# EAGLE board pic32mk (EAGLE 9.6.1)
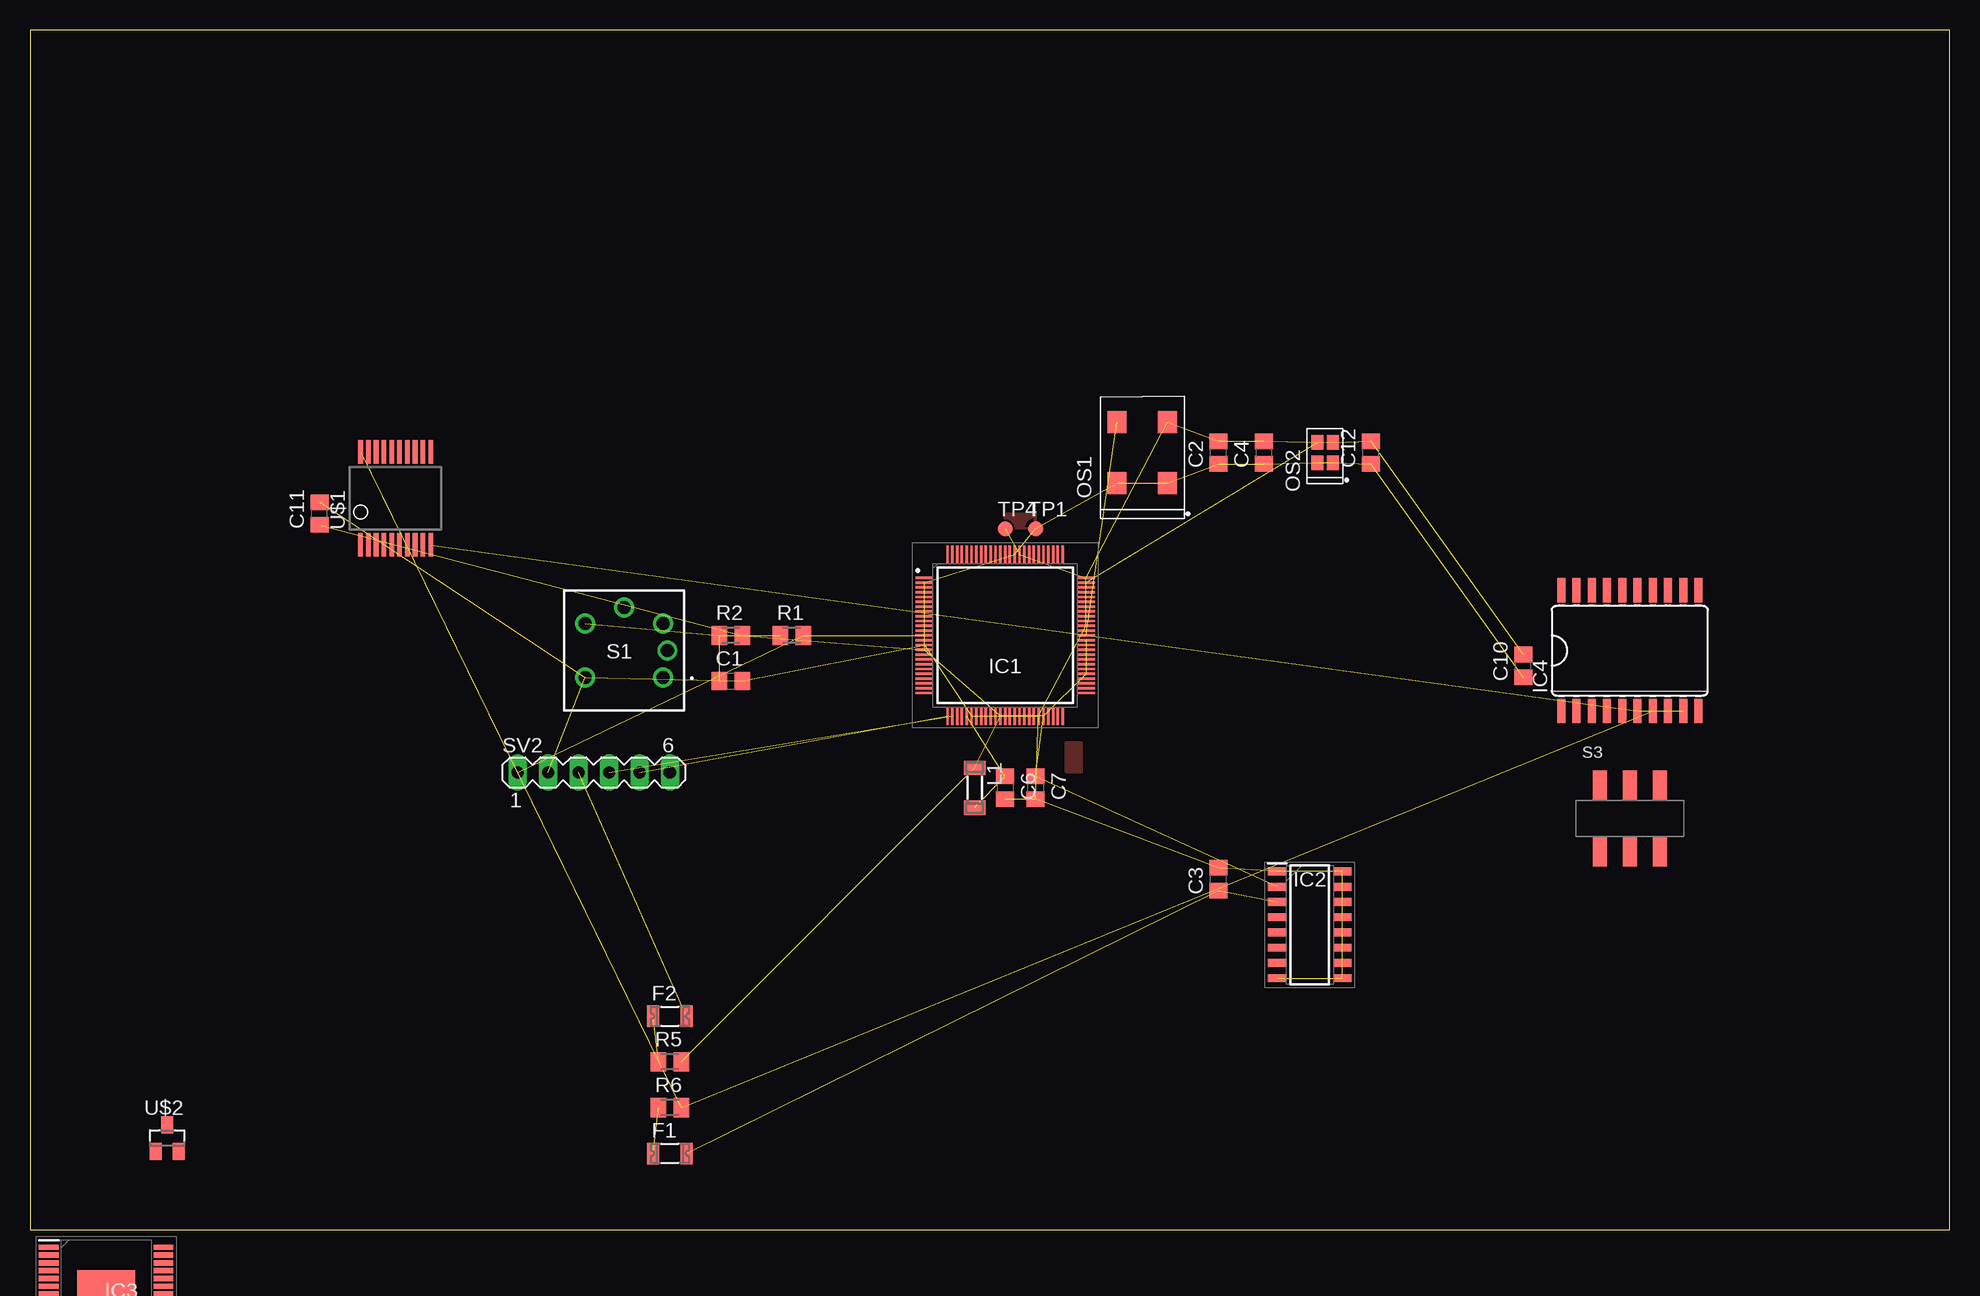
[diagram p0: board, top side]

Size 160 x 100 mm. Coordinates in mm from the lower left corner, seen from the top.
Outline: 0,0 160,0 160,100 0,100 0,0
Copper layers (1*16): Top 0.035mm / dielectric 1.5mm / Bottom 0.035mm
Design rules "default *": minimum track width 6mil, minimum drill 0.35mm, track to track 6mil, track to pad 6mil, pad to pad 6mil, via to via 6mil, smd to smd 6mil, copper to edge 40mil, drill to drill 6mil, minimum pad ring 10mil, minimum via ring 8mil, stop-mask expansion 4mil, vias tented up to drill 0mil, thermal gap 10mil
Net classes: 1 icurrent: width 0.216 mm

## Footprints (pad centres in the part's own frame; a part is rotated, then mirrored left to right if it is on the bottom)
C0805 = smd 1.3 x 1.5: 1 -0.95,0; 2 0.95,0
1206L = smd 1 x 1.8: 1 -1.4,0; 2 1.4,0
QFP40P1400X1400X120-100N = smd 1.475 x 0.2: 1 -6.738,4.8; 2 -6.738,4.4; 3 -6.738,4; 4 -6.738,3.6; 5 -6.738,3.2; 6 -6.738,2.8; 7 -6.738,2.4; 8 -6.738,2; 9 -6.738,1.6; 10 -6.738,1.2; 11 -6.738,0.8; 12 -6.738,0.4; 13 -6.738,0; 14 -6.738,-0.4; 15 -6.738,-0.8; 16 -6.738,-1.2; 17 -6.738,-1.6; 18 -6.738,-2; 19 -6.738,-2.4; 20 -6.738,-2.8; 21 -6.738,-3.2; 22 -6.738,-3.6; 23 -6.738,-4; 24 -6.738,-4.4; 25 -6.738,-4.8; 51 6.738,-4.8; 52 6.738,-4.4; 53 6.738,-4; 54 6.738,-3.6; 55 6.738,-3.2; 56 6.738,-2.8; 57 6.738,-2.4; 58 6.738,-2; 59 6.738,-1.6; 60 6.738,-1.2; 61 6.738,-0.8; 62 6.738,-0.4; 63 6.738,0; 64 6.738,0.4; 65 6.738,0.8; 66 6.738,1.2; 67 6.738,1.6; 68 6.738,2; 69 6.738,2.4; 70 6.738,2.8; 71 6.738,3.2; 72 6.738,3.6; 73 6.738,4; 74 6.738,4.4; 75 6.738,4.8 | smd 0.2 x 1.475: 26 -4.8,-6.738; 27 -4.4,-6.738; 28 -4,-6.738; 29 -3.6,-6.738; 30 -3.2,-6.738; 31 -2.8,-6.738; 32 -2.4,-6.738; 33 -2,-6.738; 34 -1.6,-6.738; 35 -1.2,-6.738; 36 -0.8,-6.738; 37 -0.4,-6.738; 38 0,-6.738; 39 0.4,-6.738; 40 0.8,-6.738; 41 1.2,-6.738; 42 1.6,-6.738; 43 2,-6.738; 44 2.4,-6.738; 45 2.8,-6.738; 46 3.2,-6.738; 47 3.6,-6.738; 48 4,-6.738; 49 4.4,-6.738; 50 4.8,-6.738; 76 4.8,6.738; 77 4.4,6.738; 78 4,6.738; 79 3.6,6.738; 80 3.2,6.738; 81 2.8,6.738; 82 2.4,6.738; 83 2,6.738; 84 1.6,6.738; 85 1.2,6.738; 86 0.8,6.738; 87 0.4,6.738; 88 0,6.738; 89 -0.4,6.738; 90 -0.8,6.738; 91 -1.2,6.738; 92 -1.6,6.738; 93 -2,6.738; 94 -2.4,6.738; 95 -2.8,6.738; 96 -3.2,6.738; 97 -3.6,6.738; 98 -4,6.738; 99 -4.4,6.738; 100 -4.8,6.738
SOIC127P600X175-16N = smd 1.525 x 0.65: 1 -2.712,4.445; 2 -2.712,3.175; 3 -2.712,1.905; 4 -2.712,0.635; 5 -2.712,-0.635; 6 -2.712,-1.905; 7 -2.712,-3.175; 8 -2.712,-4.445; 9 2.712,-4.445; 10 2.712,-3.175; 11 2.712,-1.905; 12 2.712,-0.635; 13 2.712,0.635; 14 2.712,1.905; 15 2.712,3.175; 16 2.712,4.445
SOP65P1030X245-33N = smd 1.65 x 0.45: 1 -4.775,4.875; 2 -4.775,4.225; 3 -4.775,3.575; 4 -4.775,2.925; 5 -4.775,2.275; 6 -4.775,1.625; 7 -4.775,0.975; 8 -4.775,0.325; 9 -4.775,-0.325; 10 -4.775,-0.975; 11 -4.775,-1.625; 12 -4.775,-2.275; 13 -4.775,-2.925; 14 -4.775,-3.575; 15 -4.775,-4.225; 16 -4.775,-4.875; 17 4.775,-4.875; 18 4.775,-4.225; 19 4.775,-3.575; 20 4.775,-2.925; 21 4.775,-2.275; 22 4.775,-1.625; 23 4.775,-0.975; 24 4.775,-0.325; 25 4.775,0.325; 26 4.775,0.975; 27 4.775,1.625; 28 4.775,2.275; 29 4.775,2.925; 30 4.775,3.575; 31 4.775,4.225; 32 4.775,4.875 | smd 4.8 x 5.9: 33 0,0
SO20L = smd 0.66 x 2.032: 1 -5.715,-5.029; 2 -4.445,-5.029; 3 -3.175,-5.029; 4 -1.905,-5.029; 5 -0.635,-5.029; 6 0.635,-5.029; 7 1.905,-5.029; 8 3.175,-5.029; 9 4.445,-5.029; 10 5.715,-5.029; 11 5.715,5.029; 12 4.445,5.029; 13 3.175,5.029; 14 1.905,5.029; 15 0.635,5.029; 16 -0.635,5.029; 17 -1.905,5.029; 18 -3.175,5.029; 19 -4.445,5.029; 20 -5.715,5.029
SM-1206 = smd 1.2 x 1.8: 1 -1.65,0; 2 1.65,0
7.2X5.2-4-PAD = smd 1.8 x 1.6: 1 -2.54,-2.1; 2 2.54,-2.1; 3 2.54,2.1; 4 -2.54,2.1
2.5X2-4-PAD = smd 1.2 x 1: 1 -0.85,-0.65; 2 0.85,-0.65; 3 0.85,0.65; 4 -0.85,0.65
M0805 = smd 1.3 x 1.6: 1 -0.95,0; 2 0.95,0
B3W-9_1-LED = drill 1.1 pad 1.65: 1 3.25,-2.25; 2 -3.25,-2.25; 3 3.25,2.25; 4 -3.25,2.25; 5 0,3.6; 6 3.6,0
SW_JS202011SCQN = smd 1.2 x 2.5: 1 -2.5,-2.75; 2 0,-2.75; 3 2.5,-2.75; 4 -2.5,2.75; 5 0,2.75; 6 2.5,2.75
MA06-1 = drill 1.016 long: 1 -6.35,0; 2 -3.81,0; 3 -1.27,0; 4 1.27,0; 5 3.81,0; 6 6.35,0
B1,27 = smd 1.27 x 1.27: TP 0,0
SSOP20 = smd 0.381 x 1.93: CH_L 2.925,3.879; EN_L -2.925,-3.879; GND 2.925,-3.879; IN1 -2.275,-3.879; IN2 -1.625,-3.879; IN3 -0.975,-3.879; IN4 -0.325,-3.879; IN5 0.325,-3.879; IN6 0.975,-3.879; IN7 1.625,-3.879; IN8 2.275,-3.879; OUT1 -2.275,3.879; OUT2 -1.625,3.879; OUT3 -0.975,3.879; OUT4 -0.325,3.879; OUT5 0.325,3.879; OUT6 0.975,3.879; OUT7 1.625,3.879; OUT8 2.275,3.879; VCC -2.917,3.868
SOT23 = smd 1 x 1.4: 1 -0.95,-1.1; 2 0.95,-1.1; 3 0,1.1

## Placement (x,y rotation side)
C1  0.1  [C0805]  58.42,45.72 0 top
C2  0.1  [C0805]  99.06,64.77 90 top
C3  0.1  [C0805]  99.06,29.21 90 top
C4  0.1  [C0805]  102.87,64.77 90 top
C6  0.1  [C0805]  81.28,36.83 270 top
C7  0.1  [C0805]  83.82,36.83 270 top
C10  0.1  [C0805]  124.46,46.99 90 top
C11  0.1  [C0805]  24.13,59.69 90 top
C12  0.1  [C0805]  111.76,64.77 90 top
F1  1206L050  [1206L]  53.34,6.35 0 top
F2  1206L050  [1206L]  53.34,17.78 0 top
IC1  PIC32MK1024MCF100-I_PT  [QFP40P1400X1400X120-100N]  81.28,49.53 0 top
IC2  ADM3095EBRZ  [SOIC127P600X175-16N]  106.68,25.4 0 top
IC3  MC33931EK  [SOP65P1030X245-33N]  6.35,-6.35 0 top
IC4  MAX203ECWP  [SO20L]  133.35,48.26 0 top
IC5  MC33931EK  [SOP65P1030X245-33N]  6.35,-19.05 0 top  (outside the outline)
L1  1000  [SM-1206]  78.74,36.83 270 top
OS1  OSC-OE-CFPS-32  [7.2X5.2-4-PAD]  92.71,64.77 90 top
OS2  OSC-OE-IQXO-793  [2.5X2-4-PAD]  107.95,64.77 90 top
R1  1k  [M0805]  63.5,49.53 0 top
R2  10k  [M0805]  58.42,49.53 0 top
R5  0  [M0805]  53.34,13.97 0 top
R6  0  [M0805]  53.34,10.16 0 top
S1  B3W-9000-Y1N  [B3W-9_1-LED]  49.53,48.26 0 top
S3  JS202011SCQN  [SW_JS202011SCQN]  133.35,34.29 0 top
SV2  ICSP2  [MA06-1]  46.99,38.1 0 top
TP1  TPB1,27  [B1,27]  83.82,58.42 0 top
TP4  TPB1,27  [B1,27]  81.28,58.42 0 top
U$1  MAX6818  [SSOP20]  30.48,60.96 0 top
U$2  IRLML2502TRPBF  [SOT23]  11.43,7.62 0 top

## Library data of the parts
C1-C4 C6 C7 C10-C12 = rcl; SPICEPREFIX: C
F1 F2 = polyfuse-smd_10; MF: Littelfuse; MPN: 1206L050; OC_FARNELL: 1596993; OC_NEWARK: 53M6118
IC1 = PIC32MK1024MCF100-I_PT; DESCRIPTION: Microchip Technology MCU32, 120MHz, 4 I2C, 6 I2S, USB FS, CAN 2.0B, 12-bit ADC, Motor Control; HEIGHT: 1.2mm; MANUFACTURER_NAME: Microchip; MANUFACTURER_PART_NUMBER: PIC32MK1024MCF100-I/PT; MOUSER_PART_NUMBER: 579-2MK1024MCF100IPT; MOUSER_PRICE-STOCK: https://www.mouser.com/Search/Refine.aspx?Keyword=579-2MK1024MCF100IPT; RS_PART_NUMBER: 1449608P; RS_PRICE-STOCK: http://uk.rs-online.com/web/p/products/1449608P
IC2 = SamacSys_Parts; DESCRIPTION: Level 4 EMC Protected RS-485 Transceiver with Full +/-42 V Fault Protection; HEIGHT: 1.75mm; MANUFACTURER_NAME: Analog Devices; MANUFACTURER_PART_NUMBER: ADM3095EBRZ; MOUSER_PART_NUMBER: 584-ADM3095EBRZ; MOUSER_PRICE-STOCK: https://www.mouser.com/Search/Refine.aspx?Keyword=584-ADM3095EBRZ
IC3 IC5 = MC33931EK; ARROW_PART_NUMBER: MC33931EK; DESCRIPTION: Motor / Motion / Ignition Controllers & Drivers 5A H-BRIDGE; HEIGHT: 2.45mm; MANUFACTURER_NAME: NXP; MANUFACTURER_PART_NUMBER: MC33931EK; MOUSER_PART_NUMBER: 841-MC33931EK; MOUSER_PRICE-STOCK: https://www.mouser.co.uk/ProductDetail/NXP-Semiconductors/MC33931EK?qs=MTnpjZtrqA0k3nWpYino1Q%3D%3D
IC4 = maxim; MPN: MAX203ECWP+G36; OC_FARNELL: 1224204; OC_NEWARK: 89K3435
L1 = inductor-neosid; OC_FARNELL: unknown; OC_NEWARK: unknown
OS1 OS2 = IQD-Frequency-Products
R1 R2 R5 R6 = rcl; SPICEPREFIX: R
S1 = B3W-9000-Y1N; ALLIED_NUMBER: 70176005; ALLIED_PRICE-STOCK: https://www.alliedelec.com/omron-electronic-components-b3w-9000-y1n/70176005/; DESCRIPTION: Illuminated Tactile Switches Illuminated Ylw LED White Cap; HEIGHT: mm; MANUFACTURER_NAME: Omron Electronics; MANUFACTURER_PART_NUMBER: B3W-9000-Y1N; MOUSER_PART_NUMBER: 653-B3W-9000-Y1N; MOUSER_PRICE-STOCK: https://www.mouser.com/Search/Refine.aspx?Keyword=653-B3W-9000-Y1N
S3 = JS202011SCQN_fixed; AVAILABILITY: Unavailable; DESCRIPTION: JS Series DPDT On-On Gull Wing Surface Mount Subminiature Slide Switch; MF: C&K; MP: JS202011SCQN; PACKAGE: None; PRICE: None
SV2 = con-lstb; OC_FARNELL: unknown; OC_NEWARK: unknown
TP1 TP4 = testpad
U$1 = MAX6818; AVAILABILITY: Unavailable; MF: Maxim Integrated; MP: MAX6818; PACKAGE: None; PRICE: None
U$2 = IRLML2502TRPBF; DESCRIPTION: Single N-Channel 20 V 0.08 Ohm 12 nC 1.25 W Silicon SMT Mosfet - SOT-23; DIGI-KEY_PART_NUMBER: IRLML2502TRPBFCT-ND; DIGI-KEY_PURCHASE_URL: https://www.digikey.com/product-detail/en/infineon-technologies/IRLML2502TRPBF/IRLML2502TRPBFCT-ND/812502?utm_source=snapeda&utm_medium=aggregator&utm_campaign=symbol; MF: Infineon; MP: IRLML2502TRPBF; PACKAGE: SOT-23-3 Infineon

## Nets
+3V3 [icurrent]: F2.2 SV2.3
+5V [icurrent]: C3.1 F1.2 IC2.3
GND [icurrent]: IC4.6 IC4.9 U$1.GND
N$1: C1.1 R1.1 R2.1 S1.4
N$2: IC1.13 R1.2 SV2.1
N$3: F2.1 R5.1
N$6: C6.1 IC1.30 L1.2
N$7: IC1.63 OS1.3
N$9: F1.1 R6.1
N$13: IC1.27 SV2.4
N$14: IC1.26 SV2.5
N$16: IC1.74 OS2.3
VCC [icurrent]: IC4.7 R6.2 U$1.VCC
VDD [icurrent]: C2.1 C4.1 C7.1 C10.1 C11.1 C12.1 IC1.2 IC1.16 IC1.37 IC1.46 IC1.55 IC1.62 IC1.86 IC2.2 L1.1 OS1.1 OS1.4 OS2.1 OS2.4 R2.2 R5.2 TP1.TP
VSS [icurrent]: C1.2 C2.2 C3.2 C4.2 C6.2 C7.2 C10.2 C11.2 C12.2 IC1.15 IC1.31 IC1.36 IC1.45 IC1.65 IC1.75 IC1.85 IC2.1 IC2.8 IC2.9 IC2.10 IC2.12 IC2.13 IC2.15 IC2.16 OS1.2 OS2.2 S1.2 SV2.2 TP4.TP

## Tracks (layer width: path | path; a pad name or v marks a point on that pad's centre or on a via)
+3V3  (1 unrouted)
+5V  (2 unrouted)
GND  (2 unrouted)
N$1  (3 unrouted)
N$2  (2 unrouted)
N$3  (1 unrouted)
N$6  (2 unrouted)
N$7  (1 unrouted)
N$9  (1 unrouted)
N$13  (1 unrouted)
N$14  (1 unrouted)
N$16  (1 unrouted)
VCC  (2 unrouted)
VDD  (21 unrouted)
  pour Top: 86.36,40.64 87.63,40.64 87.63,38.1 86.36,38.1
  pour Top: 81.28,59.69 83.82,59.69 83.82,58.42 81.28,58.42
VSS  (28 unrouted)